# EAGLE board LEDDriverBoardV1.2 (EAGLE 7.7.0)
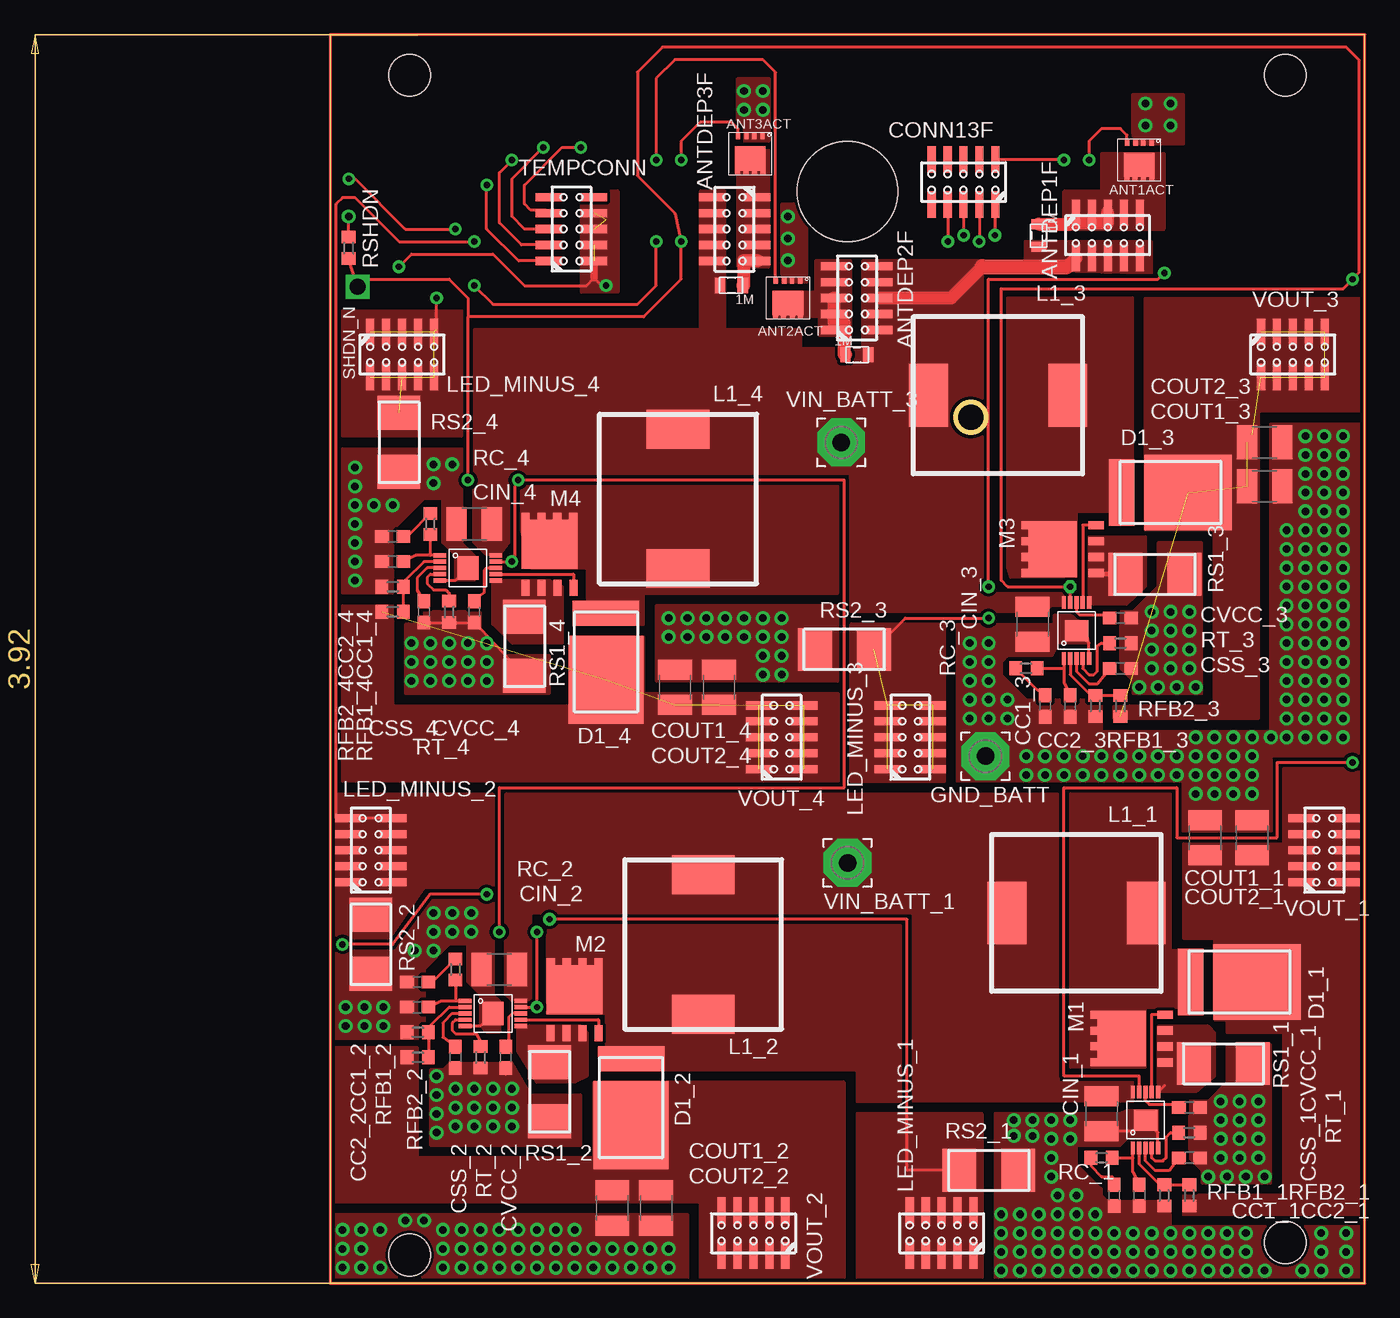
[diagram p0: board, top side]
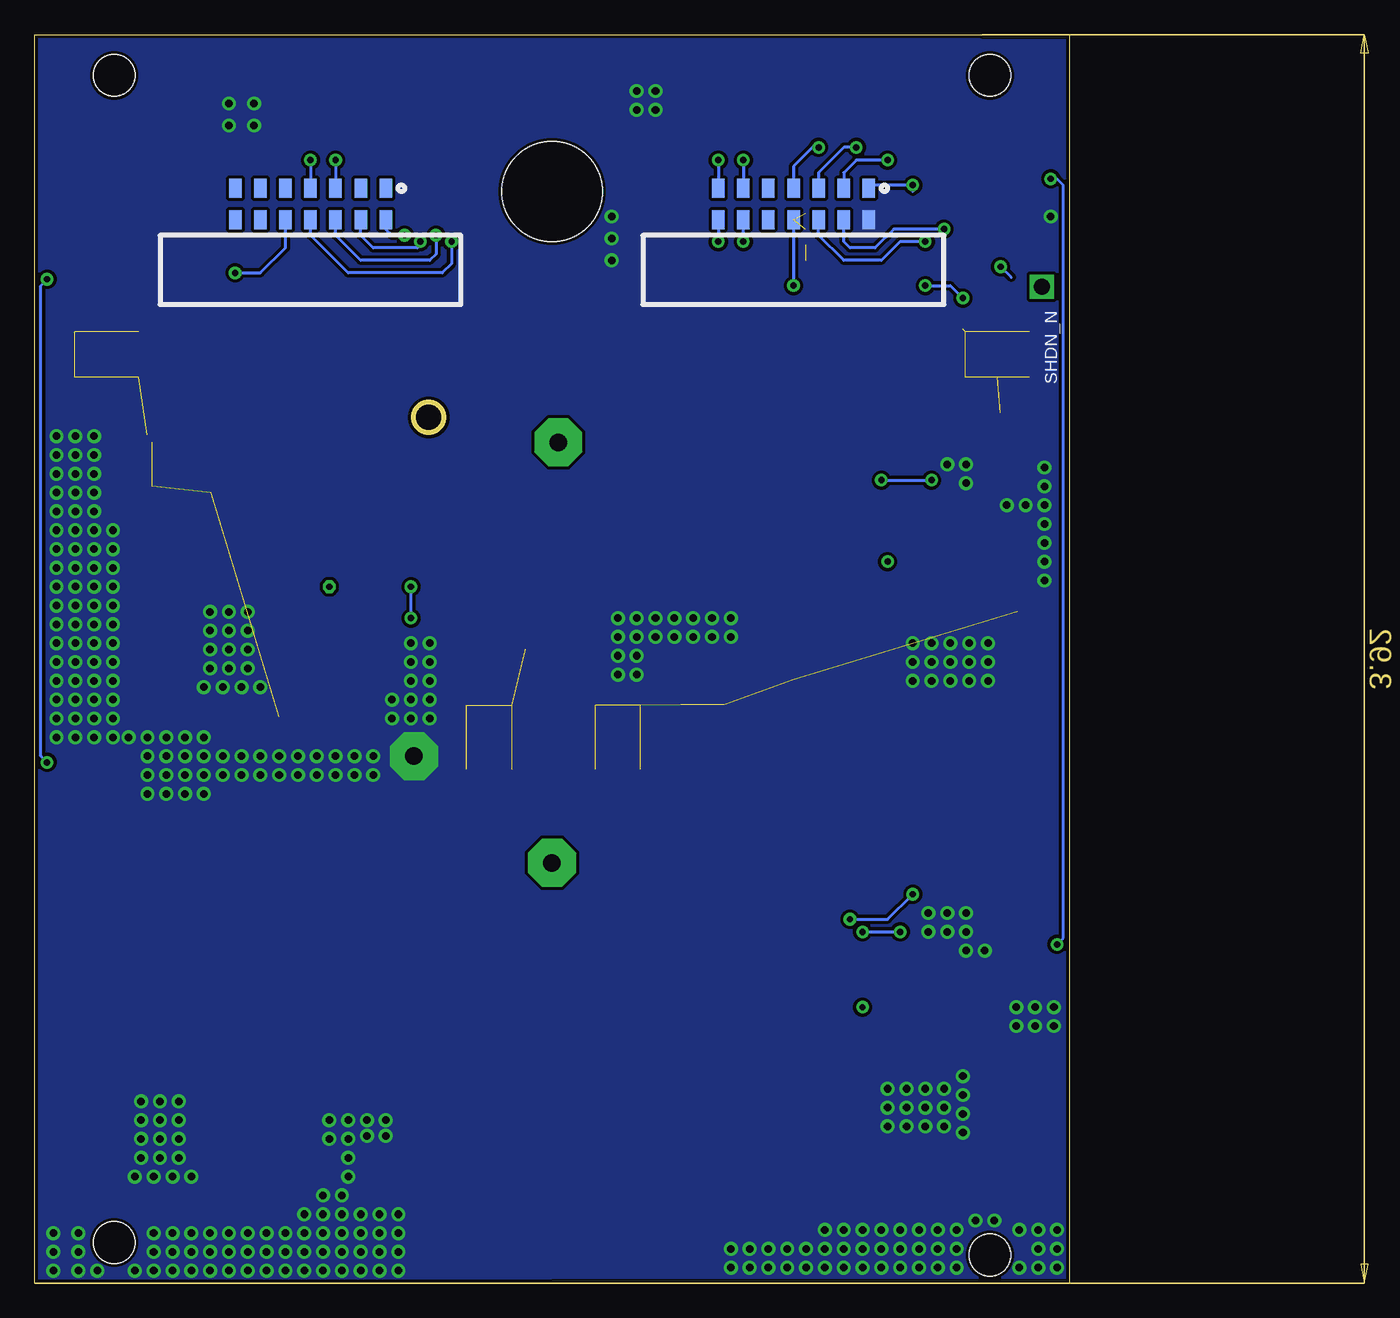
[diagram p1: board, bottom side, seen from below]

Size 82.5 x 99.5 mm. Coordinates in mm from the lower left corner, seen from the top.
Outline: 0,0 82.5,0 82.5,99.5 0,99.5 0,0
Outline: circle at 51.08,69 radius 1.2
Copper layers (1*16): Top 0.035mm / dielectric 1.5mm / Bottom 0.035mm
Design rules "AdvancedCircuitsDRC *": minimum track width 10mil, minimum drill 10mil, track to track 10mil, track to pad 10mil, pad to pad 10mil, via to via 10mil, smd to smd 10mil, copper to edge 10mil, drill to drill 10mil, minimum pad ring 10mil, minimum via ring 10mil, stop-mask expansion 4mil, vias tented up to drill 0mil, thermal gap 10mil
Holes 3.35 mm at 6.35,2.25 76.15,3.25 6.35,96.25 76.15,96.25
Holes 8 mm at 41.25,87

## Footprints (pad centres in the part's own frame; a part is rotated, then mirrored left to right if it is on the bottom)
DFN3.3X3.3 = smd 2.45 x 1.93: D1 0,0.385 | smd 0.4 x 0.35: D2 1,1.525; D3 0.35,1.525; D4 -0.35,1.525; D5 -1,1.525 | smd 0.35 x 0.55: G 0.975,-1.42; S1 -0.975,-1.42; S2 -0.325,-1.42; S3 0.3,-1.42
10PINFEMALE = smd 0.65 x 2.1: 1 -2.54,1.8; 2 -1.27,1.8; 3 0,1.8; 4 1.27,1.8; 5 2.54,1.8; 6 2.54,-1.8; 7 1.27,-1.8; 8 0,-1.8; 9 -1.27,-1.8; 10 -2.54,-1.8
C0603 = smd 1.1 x 1: 1 -0.85,0; 2 0.85,0
C1210 = smd 1.6 x 2.7: 1 -1.4,0; 2 1.4,0
SMC(Z5-T) = smd 5.3 x 2: ANODE 0,-3.9 | smd 6 x 7: CATHODE 0,1.4
14PINMALE_SMD = smd 1 x 1.5: 1 -6,-1.25; 2 -4,-1.25; 3 -2,-1.25; 4 0,-1.25; 5 2,-1.25; 6 4,-1.25; 7 6,-1.25; 8 6,1.25; 9 4,1.25; 10 2,1.25; 11 0,1.25; 12 -2,1.25; 13 -4,1.25; 14 -6,1.25
3,81/1,4 = drill 1.397 pad 3.81 octagon: 1 0,0
SRP1245A = smd 3.1 x 5: P$1 5.55,0; P$2 -5.55,0
POWERFLAT = smd 4.45 x 3.9: D 0,0 | smd 0.65 x 0.55: D5 1.9,2.225; D6 0.625,2.225; D7 -0.625,2.225; D8 -1.9,2.225 | smd 0.65 x 1.25: G 1.905,-3.475; S1 -1.905,-3.475; S2 -0.635,-3.475; S3 0.635,-3.475
0805 = smd 0.8 x 1.2: 1 -0.9,0; 2 0.9,0
R0603 = smd 1 x 1.1: 1 -0.85,0; 2 0.85,0
ERJMS4S = smd 3.4 x 2.7: A 0,2.35; B 0,-2.35
MSOP10 = smd 1 x 0.35: P$1 -2.23,1; P$2 -2.23,0.5; P$3 -2.23,0; P$4 -2.23,-0.5; P$5 -2.23,-1; P$6 2.23,-1; P$7 2.23,-0.5; P$8 2.23,0; P$9 2.23,0.5; P$10 2.23,1 | smd 1.68 x 1.88: P$11 0,0

## Placement (x,y rotation side)
ANT1ACT  AON7292  [DFN3.3X3.3]  64.5,89.5 180 top
ANT2ACT  AON7292  [DFN3.3X3.3]  36.5,78.5 180 top
ANT3ACT  AON7292  [DFN3.3X3.3]  33.5,90 180 top
ANTDEP1F  [10PINFEMALE]  62,83.5 0 top
ANTDEP2F  [10PINFEMALE]  42,78.5 90 top
ANTDEP3F  [10PINFEMALE]  32.25,84 270 top
CC1_1  22n  [C0603]  62.5,7 270 top
CC1_2  22n  [C0603]  7,24 180 top
CC1_3  22n  [C0603]  57,46 270 top
CC1_4  22n  [C0603]  5,59.5 180 top
CC2_1  100p  [C0603]  64.5,7 270 top
CC2_2  100p  [C0603]  7,22 180 top
CC2_3  100p  [C0603]  59,46 270 top
CC2_4  100p  [C0603]  5,57.5 180 top
CIN_1  10u  [C1210]  61.5,13.5 270 top
CIN_2  10u  [C1210]  13.5,25 180 top
CIN_3  10u  [C1210]  56,52.5 270 top
CIN_4  10u  [C1210]  11.5,60.5 180 top
CONN13F  [10PINFEMALE]  50.5,87.75 180 top
COUT1_1  10u  [C1210]  69.75,35.5 90 top
COUT1_2  10u  [C1210]  22.5,6 270 top
COUT1_3  10u  [C1210]  74.5,63.5 0 top
COUT1_4  10u  [C1210]  27.5,47.5 90 top
COUT2_1  10u  [C1210]  73.5,35.5 90 top
COUT2_2  10u  [C1210]  26,6 270 top
COUT2_3  10u  [C1210]  74.5,67 0 top
COUT2_4  10u  [C1210]  31,47.5 90 top
CSS_1  0.1u  [C0603]  68.5,10 0 top
CSS_2  0.1u  [C0603]  10,18 270 top
CSS_3  0.1u  [C0603]  63,49 0 top
CSS_4  0.1u  [C0603]  7.5,53.5 270 top
CVCC_1  4.7u  [C0603]  68.5,14 0 top
CVCC_2  4.7u  [C0603]  14,18 270 top
CVCC_3  4.7u  [C0603]  63,53 0 top
CVCC_4  4.7u  [C0603]  11.5,53.5 270 top
D1_1  [SMC(Z5-T)]  72.5,24 270 top
D1_2  [SMC(Z5-T)]  24,14 180 top
D1_3  [SMC(Z5-T)]  67,63 270 top
D1_4  [SMC(Z5-T)]  22,49.5 180 top
DRIVECONN1  HARWIN_14_HORIZONTAL_SMD  [14PINMALE_SMD]  22,86 180 bottom
DRIVECONN2  HARWIN_14_HORIZONTAL_SMD  [14PINMALE_SMD]  60.5,86 180 bottom
DRIVECONN2A  HARWIN_10_HORIZONTAL_SMD  [10PINFEMALE]  -30,-6 0 top  (outside the outline)
GND_BATT  [3,81/1,4]  52.25,42 0 top
L1_1  1.5u  [SRP1245A]  59.5,29.5 180 top
L1_2  1.5u  [SRP1245A]  29.75,27 90 top
L1_3  1.5u  [SRP1245A]  53.25,70.75 180 top
L1_4  1.5u  [SRP1245A]  27.75,62.5 90 top
LED_MINUS_1  [10PINFEMALE]  48.75,4 180 top
LED_MINUS_2  [10PINFEMALE]  3.25,34.5 90 top
LED_MINUS_3  [10PINFEMALE]  46.25,43.5 90 top
LED_MINUS_4  [10PINFEMALE]  5.75,74 0 top
M1  [POWERFLAT]  63.1,19.5 90 top
M2  [POWERFLAT]  19.5,23.4 0 top
M3  [POWERFLAT]  57.6,58.5 90 top
M4  [POWERFLAT]  17.5,58.9 0 top
R1  1M  [0805]  42,74 0 top
R2  1M  [0805]  32,79.5 180 top
R3  1M  [0805]  56.5,83.5 270 top
RC_1  10k  [R0603]  61.5,10 0 top
RC_2  10k  [R0603]  10,25 270 top
RC_3  10K  [R0603]  55.5,49 0 top
RC_4  10k  [R0603]  8,60.5 270 top
RFB1_1  1k  [R0603]  66.5,7 90 top
RFB1_2  1k  [R0603]  7,20 0 top
RFB1_3  1k  [R0603]  61,46 90 top
RFB1_4  1k  [R0603]  5,55.5 0 top
RFB2_1  22.125k  [R0603]  68.5,7 270 top
RFB2_2  22.125k  [R0603]  7,18 180 top
RFB2_3  22.125k  [R0603]  63,46 270 top
RFB2_4  22.125k  [R0603]  5,53.5 180 top
RS1_1  3m  [ERJMS4S]  71.2,17.5 90 top
RS1_2  3m  [ERJMS4S]  17.5,15.25 0 top
RS1_3  3m  [ERJMS4S]  65.75,56.5 90 top
RS1_4  3m  [ERJMS4S]  15.5,50.75 0 top
RS2_1  3m  [ERJMS4S]  52.5,9 90 top
RS2_2  3m  [ERJMS4S]  3.25,27 0 top
RS2_3  3m  [ERJMS4S]  41,50.5 270 top
RS2_4  3m  [ERJMS4S]  5.5,67 0 top
RSHDN  1k  [R0603]  1.5,82.5 270 top
RT_1  24.3k  [R0603]  68.5,12 180 top
RT_2  24.3k  [R0603]  12,18 90 top
RT_3  24.3k  [R0603]  63,51 180 top
RT_4  24.3k  [R0603]  9.5,53.5 90 top
TEMPCONN  [10PINFEMALE]  19.25,84 90 top
U1  [MSOP10]  65,13 90 top
U2  [MSOP10]  13,21.5 0 top
U3  [MSOP10]  59.5,52 90 top
U4  [MSOP10]  11,57 0 top
VIN_BATT_1  [3,81/1,4]  41.25,33.5 0 top
VIN_BATT_3  [3,81/1,4]  40.75,67 0 top
VOUT_1  [10PINFEMALE]  79.25,34.5 90 top
VOUT_2  [10PINFEMALE]  33.75,4 180 top
VOUT_3  [10PINFEMALE]  76.75,74 0 top
VOUT_4  [10PINFEMALE]  36,43.5 90 top

## Library data of the parts
ANT1ACT ANT2ACT ANT3ACT ANTDEP1F ANTDEP2F ANTDEP3F CONN13F DRIVECONN1 DRIVECONN2 DRIVECONN2A LED_MINUS_1-LED_MINUS_4 M1-M4 TEMPCONN U1-U4 VOUT_1-VOUT_4 = LED_Driver_Board
CC1_1-CC1_4 CC2_1-CC2_4 CIN_1-CIN_4 COUT1_1-COUT1_4 COUT2_1-COUT2_4 CSS_1-CSS_4 CVCC_1-CVCC_4 = rcl
D1_1-D1_4 L1_1-L1_4 RS1_1-RS1_4 RS2_1-RS2_4 = Cubesat
GND_BATT VIN_BATT_1 VIN_BATT_3 = wirepad
R1-R3 = CNTRL_BOARD
RC_1-RC_4 RFB1_1-RFB1_4 RFB2_1-RFB2_4 RSHDN RT_1-RT_4 = resistor

## Nets
5V_1: DRIVECONN1.11 TEMPCONN.7 TEMPCONN.8 TEMPCONN.9 TEMPCONN.10
FBX_1: RFB1_1.2 RFB2_1.1 U1.P$2
FBX_2: RFB1_2.2 RFB2_2.1 U2.P$2
FBX_3: RFB1_3.2 RFB2_3.1 U3.P$2
FBX_4: RFB1_4.2 RFB2_4.1 U4.P$2
FET_SENSE_1: M1.S1 M1.S2 M1.S3 RS1_1.A U1.P$6
FET_SENSE_2: M2.S1 M2.S2 M2.S3 RS1_2.A U2.P$6
FET_SENSE_3: M3.S1 M3.S2 M3.S3 RS1_3.A U3.P$6
FET_SENSE_4: M4.S1 M4.S2 M4.S3 RS1_4.A U4.P$6
G_ANT1: ANT1ACT.G DRIVECONN2.4
G_ANT2: ANT2ACT.G DRIVECONN1.6
G_ANT3: ANT3ACT.G DRIVECONN1.7
GATE_1: M1.G U1.P$7
GATE_2: M2.G U2.P$7
GATE_3: M3.G U3.P$7
GATE_4: M4.G U4.P$7
GND: ANT1ACT.S1 ANT1ACT.S2 ANT1ACT.S3 ANT2ACT.S1 ANT2ACT.S2 ANT2ACT.S3 ANT3ACT.S1 ANT3ACT.S2 ANT3ACT.S3 CC1_1.2 CC1_2.2 CC1_3.2 CC1_4.2 CC2_1.2 CC2_2.2 CC2_3.2 CC2_4.2 CIN_1.2 CIN_2.2 CIN_3.2 CIN_4.2 COUT1_1.2 COUT1_2.2 COUT1_3.2 COUT1_4.2 COUT2_1.2 COUT2_2.2 COUT2_3.2 COUT2_4.2 CSS_1.2 CSS_2.2 CSS_3.2 CSS_4.2 CVCC_1.2 CVCC_2.2 CVCC_3.2 CVCC_4.2 DRIVECONN1.14 GND_BATT.1 RFB1_1.1 RFB1_2.1 RFB1_3.1 RFB1_4.1 RS1_1.B RS1_2.B RS1_3.B RS1_4.B RS2_1.B RS2_2.B RS2_3.B RS2_4.B RSHDN.1 RT_1.1 RT_2.1 RT_3.1 RT_4.1 U1.P$5 U1.P$11 U2.P$5 U2.P$11 U3.P$5 U3.P$11 U4.P$5 U4.P$11
INTVCC_1: CVCC_1.1 U1.P$8
INTVCC_2: CVCC_2.1 U2.P$8
INTVCC_3: CVCC_3.1 U3.P$8
INTVCC_4: CVCC_4.1 U4.P$8
IR_SCL: CONN13F.3 DRIVECONN2.12
IR_SDA: CONN13F.2 DRIVECONN2.13
IR_VDD: CONN13F.4 DRIVECONN2.11
LDM_1: D1_1.ANODE L1_1.P$2 M1.D M1.D5 M1.D6 M1.D7 M1.D8
LDM_2: D1_2.ANODE L1_2.P$2 M2.D M2.D5 M2.D6 M2.D7 M2.D8
LDM_3: D1_3.ANODE L1_3.P$2 M3.D M3.D5 M3.D6 M3.D7 M3.D8
LDM_4: D1_4.ANODE L1_4.P$2 M4.D M4.D5 M4.D6 M4.D7 M4.D8
LED1TEMP-: DRIVECONN1.2 TEMPCONN.2
LED2TEMP-: DRIVECONN1.3 TEMPCONN.3
LED4TEMP-: DRIVECONN1.1 TEMPCONN.1
LED_SENSE_1: DRIVECONN1.13 LED_MINUS_1.1 LED_MINUS_1.2 LED_MINUS_1.3 LED_MINUS_1.4 LED_MINUS_1.5 LED_MINUS_1.6 LED_MINUS_1.7 LED_MINUS_1.8 LED_MINUS_1.9 LED_MINUS_1.10 RS2_1.A
LED_SENSE_2: DRIVECONN1.12 LED_MINUS_2.1 LED_MINUS_2.2 LED_MINUS_2.3 LED_MINUS_2.4 LED_MINUS_2.5 LED_MINUS_2.6 LED_MINUS_2.7 LED_MINUS_2.8 LED_MINUS_2.9 LED_MINUS_2.10 RS2_2.A
LED_SENSE_3: DRIVECONN2.10 LED_MINUS_3.1 LED_MINUS_3.2 LED_MINUS_3.3 LED_MINUS_3.4 LED_MINUS_3.5 LED_MINUS_3.6 LED_MINUS_3.7 LED_MINUS_3.8 LED_MINUS_3.9 LED_MINUS_3.10 RS2_3.A
LED_SENSE_4: DRIVECONN1.9 LED_MINUS_4.1 LED_MINUS_4.2 LED_MINUS_4.3 LED_MINUS_4.4 LED_MINUS_4.5 LED_MINUS_4.6 LED_MINUS_4.7 LED_MINUS_4.8 LED_MINUS_4.9 LED_MINUS_4.10 RS2_4.A
N$1: CC1_2.1 RC_2.1
N$2: CC1_3.1 RC_3.1
N$3: CC1_1.1 RC_1.1
N$4: CC1_4.1 RC_4.1
N$8: DRIVECONN1.4 TEMPCONN.4
N$17: CONN13F.10 DRIVECONN2.3
N$20: ANT3ACT.D1 ANT3ACT.D2 ANT3ACT.D3 ANT3ACT.D4 ANT3ACT.D5 ANTDEP3F.1 ANTDEP3F.2 ANTDEP3F.3 ANTDEP3F.4 ANTDEP3F.5 R2.1
N$21: ANT2ACT.D1 ANT2ACT.D2 ANT2ACT.D3 ANT2ACT.D4 ANT2ACT.D5 ANTDEP2F.1 ANTDEP2F.2 ANTDEP2F.3 ANTDEP2F.4 ANTDEP2F.5 R1.1
N$22: ANT1ACT.D1 ANT1ACT.D2 ANT1ACT.D3 ANT1ACT.D4 ANT1ACT.D5 ANTDEP1F.1 ANTDEP1F.2 ANTDEP1F.3 ANTDEP1F.4 ANTDEP1F.5 R3.1
PHOTODIODE_RETURN: CONN13F.1 DRIVECONN2.14
RT_1: RT_1.2 U1.P$4
RT_2: RT_2.2 U2.P$4
RT_3: RT_3.2 U3.P$4
RT_4: RT_4.2 U4.P$4
SHDN_N: DRIVECONN1.8 RSHDN.2 U1.P$9 U2.P$9 U3.P$9 U4.P$9
SS_1: CSS_1.1 U1.P$3
SS_2: CSS_2.1 U2.P$3
SS_3: CSS_3.1 U3.P$3
SS_4: CSS_4.1 U4.P$3
VC_1: CC2_1.1 RC_1.2 U1.P$1
VC_2: CC2_2.1 RC_2.2 U2.P$1
VC_3: CC2_3.1 RC_3.2 U3.P$1
VC_4: CC2_4.1 RC_4.2 U4.P$1
VIN_BATT_1: CIN_1.1 CIN_2.1 L1_1.P$1 L1_2.P$1 U1.P$10 U2.P$10 VIN_BATT_1.1
VIN_BATT_3: ANTDEP1F.6 ANTDEP1F.7 ANTDEP1F.8 ANTDEP1F.9 ANTDEP1F.10 ANTDEP2F.6 ANTDEP2F.7 ANTDEP2F.8 ANTDEP2F.9 ANTDEP2F.10 ANTDEP3F.6 ANTDEP3F.7 ANTDEP3F.8 ANTDEP3F.9 ANTDEP3F.10 CIN_3.1 CIN_4.1 L1_3.P$1 L1_4.P$1 R1.2 R2.2 R3.2 U3.P$10 U4.P$10 VIN_BATT_3.1
VOUT_1: COUT1_1.1 COUT2_1.1 D1_1.CATHODE RFB2_1.2 VOUT_1.1 VOUT_1.2 VOUT_1.3 VOUT_1.4 VOUT_1.5 VOUT_1.6 VOUT_1.7 VOUT_1.8 VOUT_1.9 VOUT_1.10
VOUT_2: COUT1_2.1 COUT2_2.1 D1_2.CATHODE RFB2_2.2 VOUT_2.1 VOUT_2.2 VOUT_2.3 VOUT_2.4 VOUT_2.5 VOUT_2.6 VOUT_2.7 VOUT_2.8 VOUT_2.9 VOUT_2.10
VOUT_3: COUT1_3.1 COUT2_3.1 D1_3.CATHODE RFB2_3.2 VOUT_3.1 VOUT_3.2 VOUT_3.3 VOUT_3.4 VOUT_3.5 VOUT_3.6 VOUT_3.7 VOUT_3.8 VOUT_3.9 VOUT_3.10
VOUT_4: COUT1_4.1 COUT2_4.1 D1_4.CATHODE RFB2_4.2 VOUT_4.1 VOUT_4.2 VOUT_4.3 VOUT_4.4 VOUT_4.5 VOUT_4.6 VOUT_4.7 VOUT_4.8 VOUT_4.9 VOUT_4.10

## Tracks (layer width: path | path; a pad name or v marks a point on that pad's centre or on a via)
5V_1  (via drill 0.5)  (3 unrouted)
  Top 0.254: v5.5,81 6.5,82 13,82 15.5,79.5 20.45,79.5 21.05,80.1 21.65,79.5 v22,79.5
  Top 0.61: TEMPCONN.10 21.05,80.1
  Bottom 0.254: 4.65,80.15 v5.5,81 | DRIVECONN1.11 v22,79.5
  pour Top (no thermals): 20,87 20,79 23,79 23,87
FBX_1
  Top 0.254: RFB2_1.1 RFB1_1.2 66.4,7.75 66,8 64.5,9.5 U1.P$2
FBX_2
  Top 0.254: RFB2_2.1 RFB1_2.2 7.75,20.1 8,20.5 9.5,22 U2.P$2
FBX_3
  Top 0.254: RFB2_3.1 RFB1_3.2 60.9,46.75 60.5,47 59,48.5 U3.P$2
FBX_4
  Top 0.254: RFB2_4.1 RFB1_4.2 6,55.65 6,56 7.5,57.5 U4.P$2
FET_SENSE_1
  Top 0.254: U1.P$6 66.53,15.76
  pour Top (no thermals): 66,15.25 66,20.5 70,20.5 70.5,20 70.5,16.5 69,15.25
FET_SENSE_2
  pour Top (no thermals): 15,20.5 20,20.5 20.5,20 20.5,16.5 19.5,16 16.5,16 15,18.5
FET_SENSE_3
  Top 0.406: RS1_3.A 61.02,56.5
  pour Top (no thermals): 60.5,59.5 65,59.5 65,55.5 63.5,54.1 60.5,54.1
FET_SENSE_4
  pour Top (no thermals): 13,56 17.5,56 18.5,55.5 18.5,51 14.5,51 13,52.5
G_ANT1  (via drill 0.5)
  Top 0.254: ANT1ACT.G 63.52,91.47 63,92 61.5,92 60.5,91 v60.5,89.5
  Bottom 0.254: v60.5,89.5 DRIVECONN2.4
G_ANT2  (via drill 0.5)
  Top 0.254: ANT2ACT.G 35.52,96.47 34.5,97.5 27.5,97.5 26,96 v26,89.5
  Bottom 0.254: v26,89.5 DRIVECONN1.6
G_ANT3  (via drill 0.5)
  Top 0.254: ANT3ACT.G 32.52,91.97 32,92.5 29.5,92.5 28,91 v28,89.5
  Bottom 0.254: v28,89.5 DRIVECONN1.7
GATE_1
  Top 0.254: U1.P$7 65.5,21.41 M1.G
GATE_2
  Top 0.254: U2.P$7 21.41,21 M2.G
GATE_3
  Top 0.254: M3.G 60,60.41 U3.P$7
GATE_4
  Top 0.254: U4.P$7 19.41,56.5 M4.G
GND  (via drill 0.6)
  Top 0.254: 64.1,12.1 CIN_1.2 | RT_1.1 69.35,12.15 | RT_2.1 12.15,17.15 | CVCC_2.2 14,16.65 | CSS_4.2 RT_4.1 CVCC_4.2 12,52.15 RS1_4.B | U2.P$5 12,20.5 U2.P$11 | U1.P$5 66,12 U1.P$11 | U4.P$5 10,56 U4.P$11 | U3.P$5 60.5,51 U3.P$11 | RSHDN.1 v1.5,85
  other vias: 72.5,14.5 72.5,13 74,13 74,11.5 72.5,11.5 71,11.5 71,13 71,10 71.5,8.5 73,8.5 72.5,10 74,10 8.5,15 10,15.5 11.5,15.5 13,15.5 8.5,13.5 10,14 10,12.5 11.5,14 11.5,12.5 13,12.5 13,14 14.5,12.5 14.5,14 6.5,51 6.5,49.5 8,49.5 8,51 9.5,51 9.5,49.5 8,48 9.5,48 11,49.5 11,48 11,51 12.5,49.5 12.5,48 68.5,53.5 68.5,52 68.5,50.5 68.5,49 67,49 67.5,47.5 66,47.5 65.5,49 65.5,50.5 67,50.5 67,52 65.5,52 67,53.5 74,14.5 2,62 2,63.5 2,60.5 2,65 79.25,52.5 64.5,47.5 51,51 51,49.5 8.5,16.5 70,8.5 8.5,12 8.25,26.5 27,53 27,51.5 28.5,53 28.5,51.5 30,53 30,51.5 31.5,51.5 31.5,53 34.5,53 34.5,51.5 36,51.5 36,53 52.5,46.5 21,2.75 22.5,2.75 24,2.75 25.5,2.75 25.5,1.25 24,1.25 22.5,1.25 21,1.25 1.25,20.5 1.25,22 8.25,29.5 8.25,28 4.25,22 68.5,4 74.5,8.5 56,13 59,13 69,47.5 6.5,48 11.25,28 65.5,1 27,2.75 27,1.25 52.5,51 11.25,29.5 14.5,15.5 71,14.5 12.5,51 65.5,53.5 51,48 52.5,48 59.5,4 77.75,52.5 65.5,4 51,46.5 59.5,2.5 65.5,2.5 9.75,65.25 1,4.25 2.5,4.25 4,4.25 62.5,4 2.5,2.75 1,2.75 34.5,50 3.5,62 5,62 8.25,63.75 62.5,2.5 62.5,1 2,59 2,57.5 2,56 12,4.25 56.5,4 56.5,2.5 56.5,1 1,1.25 2.5,1.25 4,1.25 9,1.25 77.75,66 77.75,64.5 77.75,63 77.75,61.5 79.25,61.5 79.25,63 79.25,64.5 79.25,66 80.75,66 80.75,64.5 80.75,63 80.75,61.5 9,4.25 77.75,67.5 79.25,67.5 80.75,67.5 2.75,22 57.5,13 68.5,1 2.75,20.5 52.5,49.5 10.5,4.25 68.5,2.5 33,51.5 33,53 80.75,52.5 4.25,20.5 8.25,65.25 59.5,1 53.5,4 53.5,2.5 53.5,1 53.5,5.5 56.5,5.5 71.5,1 71.5,2.5 71.5,4 73,4 73,2.5 73,1 79,1 79,2.5 79,4 81,4 81,2.5 81,1 57.5,8.5 57.5,10 56,11.75 54.5,13 9,2.75 10.5,2.75 57.5,11.5 59,11.5 57,42 58.5,42 60,42 61.5,42 63,42 64.5,42 57,40.5 58.5,40.5 60,40.5 61.5,40.5 63,40.5 64.5,40.5 79.25,45 77.75,45 80.75,45 77.75,43.5 79.25,43.5 80.75,43.5 77.75,51 77.75,49.5 77.75,48 77.75,46.5 79.25,46.5 79.25,48 79.25,49.5 79.25,51 80.75,51 80.75,49.5 80.75,48 80.75,46.5 76.25,51 76.25,49.5 76.25,48 76.25,46.5 77.75,58.5 77.75,57 77.75,55.5 77.75,54 79.25,54 79.25,55.5 79.25,57 79.25,58.5 80.75,58.5 80.75,57 80.75,55.5 80.75,54 77.75,60 79.25,60 80.75,60 76.25,58.5 76.25,57 76.25,55.5 76.25,54 76.25,60 76.25,52.5 76.25,45 76.25,43.5 66,42 67.5,42 69,42 70.5,42 72,42 66,40.5 67.5,40.5 69,40.5 70.5,40.5 72,40.5 69,39 70.5,39 72,39 69,43.5 70.5,43.5 72,43.5 73.5,42 73.5,40.5 73.5,39 73.5,43.5 10.5,1.25 12,2.75 12,1.25 13.5,1.25 13.5,2.75 13.5,4.25 15,4.25 16.5,4.25 18,4.25 19.5,4.25 15,2.75 16.5,2.75 18,2.75 18,1.25 16.5,1.25 15,1.25 19.5,2.75 19.5,1.25 55,1 55,2.5 55,4 55,5.5 58,1 58,2.5 58,4 61,4 61,2.5 61,1 64,4 64,2.5 64,1 67,1 67,2.5 67,4 70,4 70,2.5 70,1 74.5,1 77.5,1 58,5.5 59.5,5.5 59.5,7 58,7 61,5.5 36,50 36,48.5 34.5,48.5 54.5,11.75 33,93.5 34.5,93.5 33,95 34.5,95 36.5,81.5 7.5,5 36.5,83.25 36.5,85 65,94 67,92.25 65,92.25 6,5 9.75,28 9.75,29.5 6.75,26.5 75,43.5 67,94 51,45 52.5,45 55.5,42 55.5,40.5 54,45 54,46.5
  pour Bottom (no thermals): -2,101.5 85,101.5 85,-2.5 -2,-2.5
  pour Top (no thermals): 82.5,42 75,42 75,36 68,36 68,40 50,40 50,52.5 57.75,52.5 57.75,53.25 59,53.25 60,52.5 60.5,51 58,51 57.5,50 54,50 53.5,49.5 53.5,48.5 55.5,46.5 61.5,46.5 61.5,44 75,44 75,68.5 82.5,68.5
  pour Top (no thermals): 8,17 8,11 20,11 20,15 16,15 14.5,17.5 9.5,17.5 9,17
  pour Top (no thermals): 6,52.5 6,47 17.5,47 17.5,50 14,50 12,52 12,53.5 7.5,53.5 7.5,52.5
  pour Top (no thermals): 26,54 26,48 40.5,48 40.5,54
  pour Top (no thermals): 75,8 75,19 71.5,19 71.5,16 70,14.5 68.5,14.5 68.5,10 69.5,9 69.5,8
  pour Top (no thermals): 64,47 69.5,47 69.5,59 66,59 66,55.5 64,53.5 63,53.5 63,49 64,48
  pour Top (no thermals): 7.5,19.5 0,19.5 0,26.5 5.25,26.5 8,30.5 13,30.5 13,23 13.5,22.5 13.5,20 12.5,20 12,20.5 12,23 11,24 11,27 9.5,27 7.5,25
  pour Top (no thermals): 10.5,66.5 10.5,59 11.5,58 11.5,56 10,56 10,58 9,59 9,62.5 7.5,62.5 5,60 5,55 1,55 1,66.5
  pour Top (no thermals): 53,13.5 53,0 82.5,0 82.5,4.5 67,4.5 67,6.5 62,6.5 61.5,7 61.5,7.5 59.5,9.5 59.5,11 63,11 63.75,11.75 66,11.75 66,13.75 63.5,13.75 63,13.5
  pour Top (no thermals): 0,5.5 28.5,5.5 28.5,0 0,0
  pour Top (no thermals): 33,91 33,92.5 32.5,92.5 32.5,96 35,96 35,91
  pour Top (no thermals): 36,79.75 36,86 38,86 38,79.75
  pour Top (no thermals): 64,90.75 64,94.75 68,94.75 68,90.75
INTVCC_1
  Top 0.254: CVCC_1.1 67.4,14.25 65.3,14.25 65,14.55 U1.P$8
INTVCC_2
  Top 0.254: CVCC_2.1 14.25,19.1 14.25,21.2 14.55,21.5 U2.P$8
INTVCC_3
  Top 0.254: CVCC_3.1 61.9,53.25 59.75,53.25 59.5,53.5 U3.P$8
INTVCC_4
  Top 0.254: CVCC_4.1 12.3,55.05 12.3,56.8 12.5,57 U4.P$8
IR_SCL  (via drill 0.5)
  Top 0.254: CONN13F.3 v50.5,83.5
  Bottom 0.254: DRIVECONN2.12 58.5,83.5 56.5,81.5 51,81.5 50.5,82 v50.5,83.5
IR_SDA  (via drill 0.5)
  Top 0.254: CONN13F.2 51.75,85.95 v51.75,83
  Bottom 0.254: DRIVECONN2.13 56.5,83.5 55.5,82.5 52,82.5 51.75,82.75 v51.75,83
IR_VDD  (via drill 0.5)
  Top 0.254: CONN13F.4 49.25,85.95 v49.25,83
  Bottom 0.254: DRIVECONN2.11 60.5,83.5 57.5,80.5 50,80.5 49.25,81.25 v49.25,83
LDM_1
  pour Top (no thermals): 59,17.25 65,17.25 65,22 69.5,22 69.5,26.5 67,26.5 67,39 59,39
LDM_2
  pour Top (no thermals): 17.3,28.5 17.3,21.5 22,21.5 22,17 42,17 42,14.5 45.5,14.5 45.5,28.5
LDM_3
  pour Top (no thermals): 54,57.05 54.25,56.25 59.5,56.3 59.5,61.5 64,61.5 64,78.5 54,78.5
LDM_4
  pour Top (no thermals): 40.5,63.5 15.25,63.5 15.25,60 16,57 20.5,57 20.5,52.5 25,52.5 25,55 40.5,55
LED1TEMP-  (via drill 0.5)
  Top 0.254: TEMPCONN.2 15.27,82.73 13.5,84.5 13.5,88.5 v14.5,89.5
  Bottom 0.254: v14.5,89.5 17,89.5 18,88.5 DRIVECONN1.2
LED2TEMP-  (via drill 0.5)
  Top 0.254: TEMPCONN.3 15.5,84 14.5,85 14.5,88 v17,90.5
  Bottom 0.254: v17,90.5 18,90.5 20,88.5 DRIVECONN1.3
LED4TEMP-  (via drill 0.5)
  Top 0.254: TEMPCONN.1 15.04,81.46 12.5,84 v12.5,87.5
  Bottom 0.254: 15.75,87 DRIVECONN1.1 15.75,87.5 13,87.5 12.5,87 v12.5,87.5
LED_SENSE_1  (via drill 0.5)
  Top 0.254: RS2_1.A 46,9 46,29 v17.5,29 | v12.5,31 8,31 5,27 v1,27 | v10,84 6,84 2,88 v1.5,88
  Bottom 0.254: v17.5,29 14.5,29 v12.5,31 | v1,27 0.5,27.5 0.5,87.5 1,88 v1.5,88 | v10,84 14,84 15.5,82.5 17.5,82.5 18,83 DRIVECONN1.13
  pour Top (no thermals): 42,13.5 42,0 52,0 52,13.5
LED_SENSE_2  (via drill 0.5)
  Top 0.254: LED_MINUS_2.6 0.5,37.04 0.5,86 1,86.5 2,86.5 5.5,83 v11.5,83
  Bottom 0.254: v11.5,83 13.5,83 15,81.5 18,81.5 20,83.5 DRIVECONN1.12
  pour Top (no thermals): 0,39 13,39 13,31.5 7.5,31.5 4.75,27.5 0,27.5
LED_SENSE_3  (via drill 0.5)  (10 unrouted)
  Top 0.254: RS2_3.A 45.85,53 v52.5,53 | v52.5,55.5 52.5,80 66,80 v66.5,80.5
  Bottom 0.254: v52.5,53 v52.5,55.5 | v66.5,80.5 64.5,80.5 62.5,82.5 DRIVECONN2.10
  pour Top (no thermals): 41.5,52.5 41.5,40 49,40 49,52.5
LED_SENSE_4  (via drill 0.5)  (11 unrouted)
  Top 0.254: 8.5,76.01 v8.5,78.5 | v11.5,79.5 13,78 24.5,78 26,79.5 v26,83
  Bottom 0.254: v26,83 DRIVECONN1.9 | v11.5,79.5 9.5,79.5 v8.5,78.5
  pour Top (no thermals): 10.5,67.5 1,67.5 1,77.5 10.5,77.5
N$1
  Top 0.254: RC_2.1 8.35,24.2 CC1_2.1
N$2
  Top 0.254: RC_3.1 56.3,47.35 CC1_3.1
N$3
  Top 0.254: RC_1.1 60.65,9.35 61.5,8.5 62.35,8.5 CC1_1.1
N$4
  Top 0.254: RC_4.1 6.35,59.7 CC1_4.1
N$8  (via drill 0.5)
  Top 0.254: TEMPCONN.4 17.22,85.5 16,85.5 15.5,86 15.5,87.5 18.5,90.5 v20,90.5
  Bottom 0.254: DRIVECONN1.4 22,89 20.5,90.5 v20,90.5
N$17  (via drill 0.5)
  Top 0.254: CONN13F.10 58.45,89.55 v58.5,89.5
  Bottom 0.254: v58.5,89.5 DRIVECONN2.3
N$18
  Top 0.25: 0,0 82.5,0 82.5,99.5 0,99.5 0,0
N$20
  Top 1.016: R2.1 33,79.5 33,81.5 34.05,81.5 ANTDEP3F.5
  pour Top (no thermals): 33,87 33,81 35,81 35,87
  pour Top (no thermals): 32.5,90.25 32.5,81 35,81 35,90.25
N$21
  Top 1.016: R1.1 41,74 41,76.5 40.2,76.5 ANTDEP2F.3
  pour Top (no thermals): 41.5,75.5 39,75.5 39,81.5 41.5,81.5
  pour Top (no thermals): 35.5,79 38.75,79 38.75,81.5 41.5,81.5 41.5,75.5 39,75.5 39,77 35.5,77
N$22
  Top 1.016: R3.1 59,84.4 59,84.5 62,84.5 ANTDEP1F.3
  pour Top (no thermals): 65.5,84 58.5,84 58.5,87 65.5,87
  pour Top (no thermals): 61.5,90 61.5,87 58.5,87 58.5,84 66.5,84 66.5,90
PHOTODIODE_RETURN  (via drill 0.5)
  Top 0.254: CONN13F.1 53,85.95 v53,83.5
  Bottom 0.254: v53,83.5 54,83.5 54.5,84 DRIVECONN2.14
RT_1
  Top 0.254: RT_1.2 67,12 66.65,11.65 66.65,10 66.4,9.75 65.75,9.75 65.5,10 U1.P$4
RT_2
  Top 0.254: RT_2.2 12,19.25 11.65,19.9 10,19.9 9.75,20.15 9.75,20.75 10,21 U2.P$4
RT_3
  Top 0.254: RT_3.2 61.5,51 61.15,50.75 61.15,48.75 60.9,48.5 60.5,48.5 60,49 U3.P$4
RT_4
  Top 0.254: RT_4.2 9.5,55 9.25,55.25 8.25,55.25 7.75,55.75 7.75,56.25 8,56.5 U4.P$4
SHDN_N  (via drill 0.5, 1.27)
  Top 0.254: U3.P$9 v59,55.5 54,55.5 53.5,56 53.5,79.25 80.75,79.25 v81.5,80 82,80.5 82,97.5 81,98.5 26.5,98.5 24.5,96.5 24.5,88.25 27.5,85.25 v28,83 28,80 25,77 11,77 | U2.P$9 v16.5,22 v16.5,28 | U4.P$9 v14.5,57.5 14.75,57.75 14.75,63.5 15,63.75 v15,64 41,64 41,39.5 13.5,39.5 v13.5,28 | U1.P$9 64.5,16.5 58.5,16.5 58.5,39.5 67.5,39.5 67.5,35.5 75.5,35.5 75.5,41.5 v81.5,41.5 | v11,64 11,77 | RSHDN.2 v2.2,79.4 2.5,79.5 3,80 9.5,80 11,78.5 11,77
  Bottom 0.254: v81.5,41.5 82,42 82,79.5 v81.5,80 | v16.5,28 v13.5,28 | v15,64 v11,64 | DRIVECONN1.8 v28,83
SS_1
  Top 0.254: CSS_1.1 66.9,9 65.75,9 65,9.75 U1.P$3
SS_2
  Top 0.254: CSS_2.1 9,19.6 9,20.75 9.75,21.5 U2.P$3
SS_3
  Top 0.254: CSS_3.1 61.15,47.75 60.5,47.75 59.5,48.75 U3.P$3
SS_4
  Top 0.254: CSS_4.1 6.95,55.2 6.95,56.2 7.75,57 U4.P$3
VC_1
  Top 0.254: CC2_1.1 64,8.85 64,10 | RC_1.2 64,10 | 64,10 U1.P$1
VC_2
  Top 0.254: RC_2.2 10,22.5 | CC2_2.1 8.85,22.5 10,22.5 | 10,22.5 U2.P$1
VC_3
  Top 0.254: RC_3.2 58.5,49 | CC2_3.1 58.5,47.85 58.5,49 | U3.P$1 58.5,49
VC_4
  Top 0.254: RC_4.2 8,58 | CC2_4.1 6.85,58 8,58 | U4.P$1 8,58
VIN_BATT_1
  pour Top (no thermals): 58,39 58,16 64,16 64,14.5 46.5,14.5 46.5,29.5 16,29.5 16,22.5 14.5,22.5 14,23 14,39
VIN_BATT_3
  Top 1.016: ANTDEP2F.8 49.5,78.5 52,81 | 58.76,81 ANTDEP1F.10
  Top 1.2: 52,81 58.76,81
  pour Top (no thermals): 41.5,64.5 14.25,64.5 14.25,59 13.5,58 12.5,58 11.5,59 11.5,76 37.5,76 37.5,74.5 42.5,74.5 42.5,81.5 52,81.5 52,55 58.5,55 58.5,54 57.5,54 57,53.5 41.5,53.5
  pour Top (no thermals): 55.4,83 55.4,80.7 65.5,80.5 65.5,83
  pour Top (no thermals): 29.5,87 29.5,75.5 31.5,75.5 31.5,87
VOUT_1
  Top 0.254: 73.6,24.3 D1_1.CATHODE 76.5,21.9
  pour Top (no thermals): 70.5,21.5 70.5,27 74.5,22.5
  pour Top (no thermals): 68,7 68,5.5 82.5,5.5 82.5,41 76,41 76,35 68,35 68,27.5 70.5,27.5 70.5,21 71.5,21 71.5,20 76,20 76,7
VOUT_2
  Top 0.254: 6.5,17.85 RFB2_2.2
  Top 0.406: D1_2.CATHODE 25.5,12.6
  pour Top (no thermals): 0,18.75 0,6.5 29.5,6.5 29.5,0 41,0 41,16 21,16 21,10 7,10 7,18.75
VOUT_3  (13 unrouted)
  Top 0.254: 73.5,67.6 COUT2_3.1
  pour Top (no thermals): 62.5,46 70.5,46 70.5,60 65,60 65,78.5 82.5,78.5 82.5,69.5 74,69.5 74,45 62.5,45
VOUT_4  (13 unrouted)
  pour Top (no thermals): 40.5,47 40.5,40 1,40 1,54 5,54 5,46 19.5,46 19.5,51.5 25,51.5 25,47

## Text on the board
tPlace: SHDN_N
bPlace: SHDN_N
Document: Brown University CubeSat: EquiSat | LED Driver Board: V1.1 / Designer: Kyle Erf '16